# Altium PCB AdaptadorUSB.PCBDOC
Units mm, origin at the board's own origin, x right, y up, seen from the top; angles counter-clockwise.
Board outline 152.4 x 101.6 mm, 2 copper layers (Top Layer, Bottom Layer); 14 components, 31 nets, 108 pads, 3 vias.
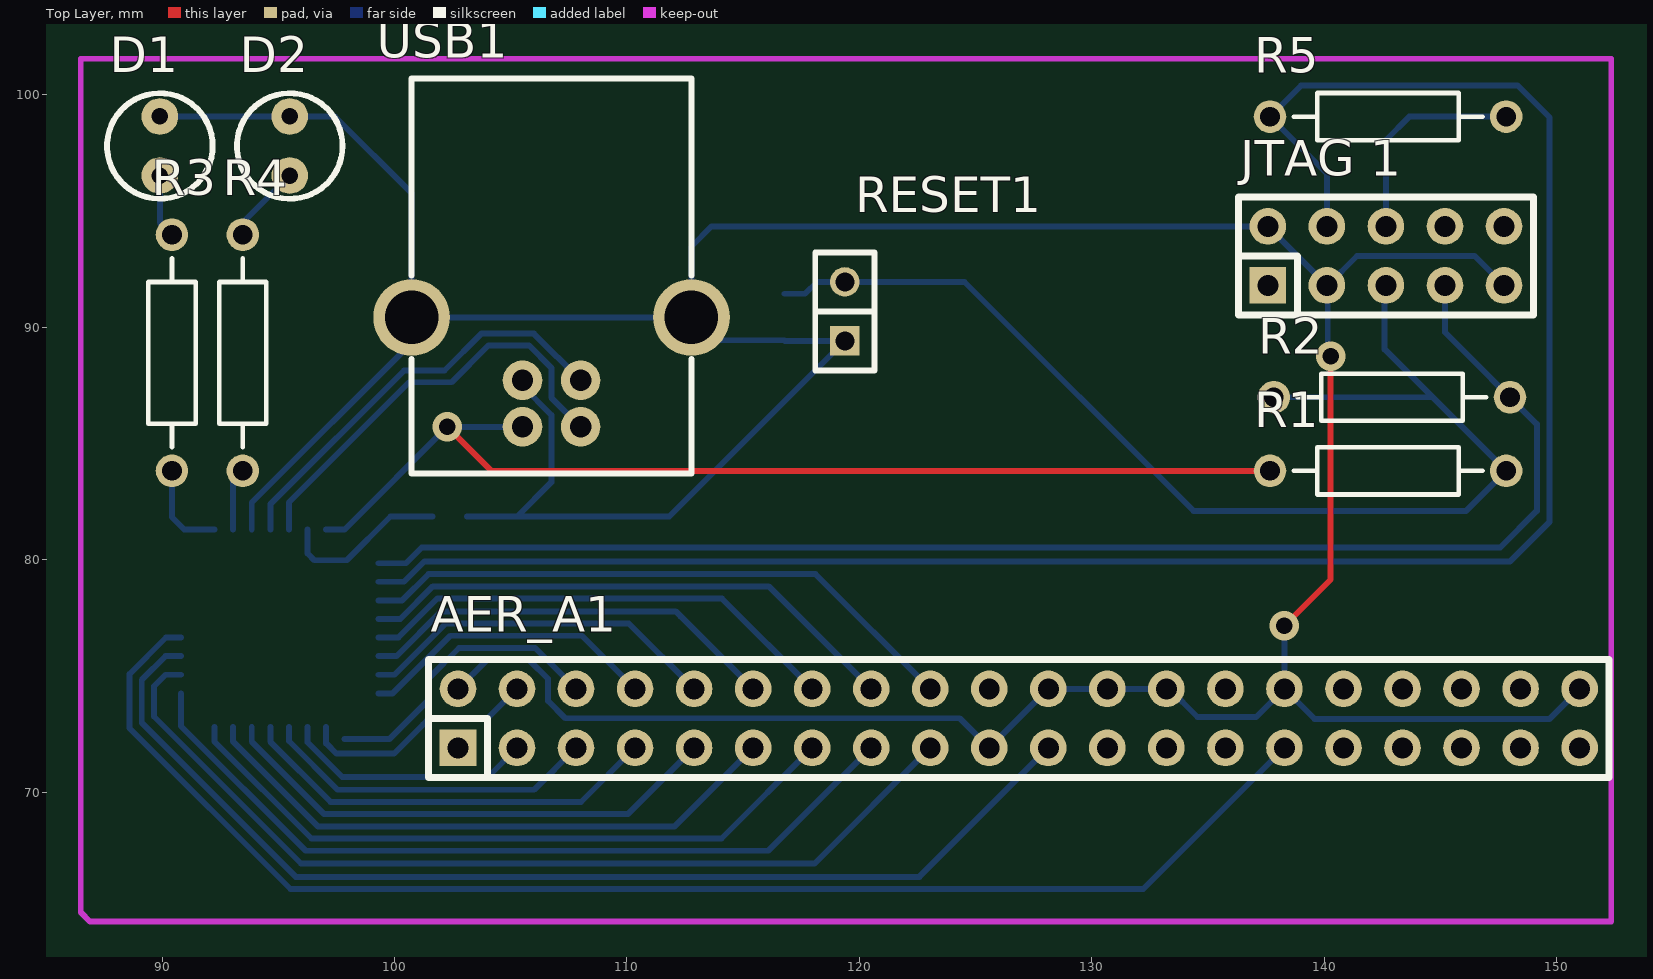
[diagram p0: Top Layer view]
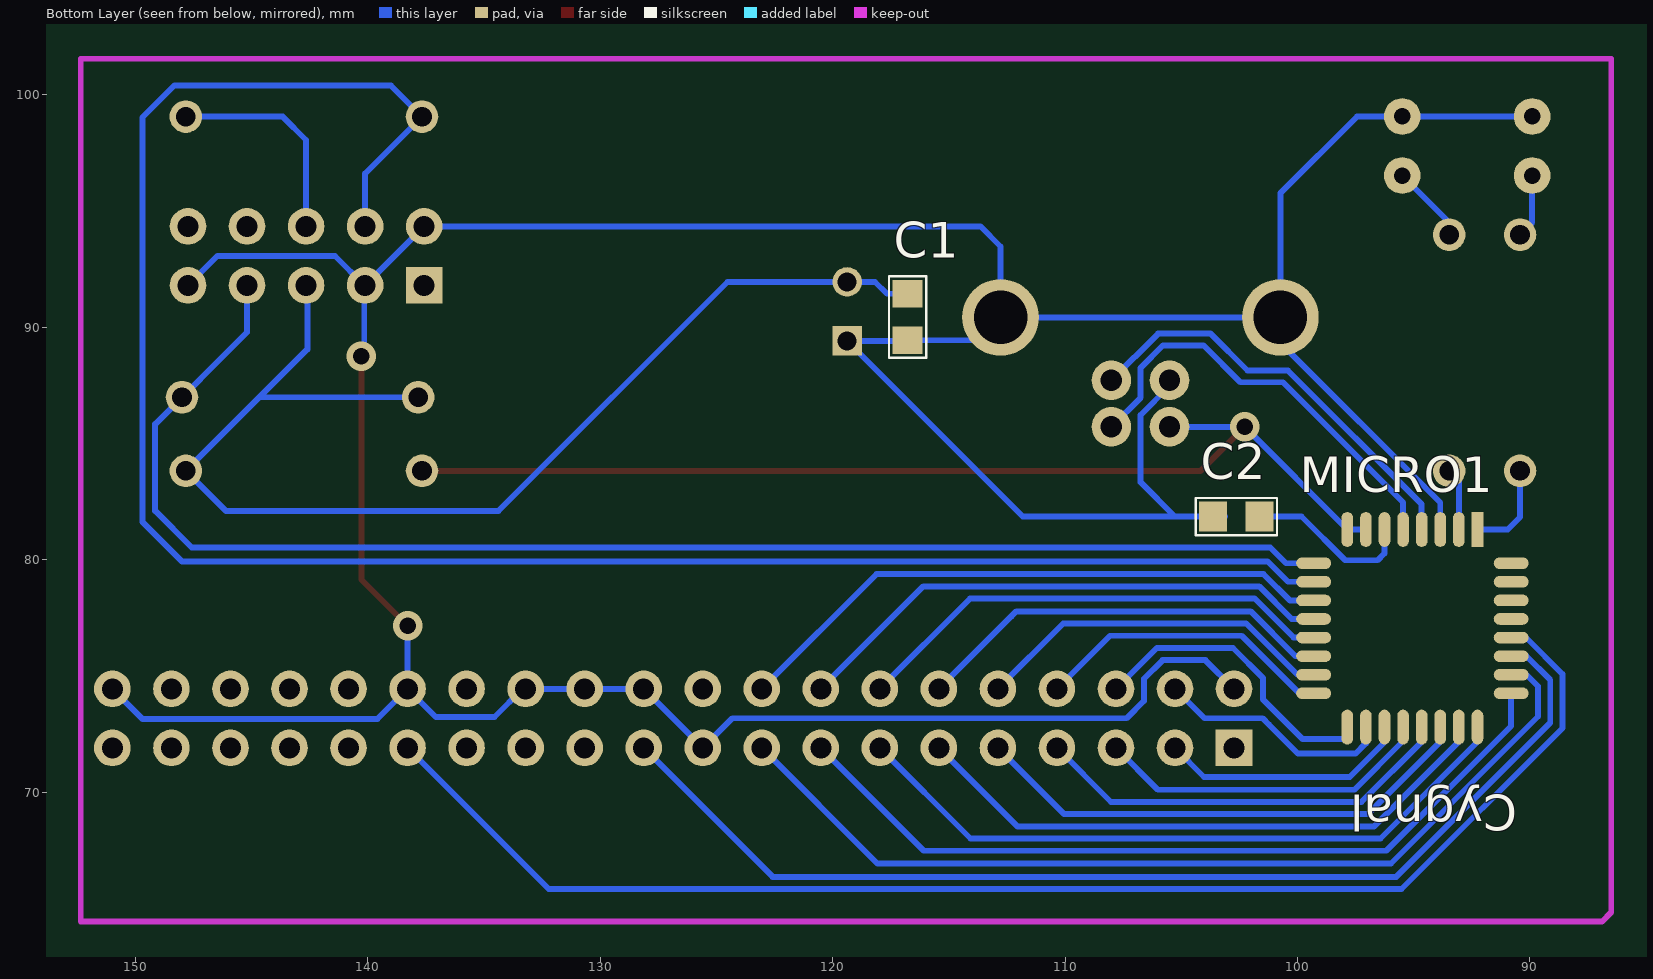
[diagram p1: Bottom Layer view, seen from below]

## Layer stack, top to bottom
Top Layer: signal copper 0.0356
Dielectric: dielectric 0.32, FR-4, Dk 4.8
Bottom Layer: signal copper 0.0356

## Board outline
25.4,25.4 177.8,25.4 177.8,127 25.4,127

## Design rules (kind name [scope] priority, off if disabled: settings)
Clearance [All] p1: gap=0.254
ComponentClearance [All] p1: gap=0.254 collisioncheckmode=0
PolygonConnect [All] p1: connectstyle=Relief reliefconductorwidth=0.254 reliefentries=4 polygonreliefangle="90 Angle"
RoutingLayers [All] p1: top layer=Horizontal bottom layer=Vertical
RoutingVias [All] p1: holewidth=0.711 width=1.27 viastyle="Through Hole" minholewidth=0.711 minwidth=1.27 maxholewidth=0.711 maxwidth=1.27
SolderMaskExpansion [All] p1: expansion=0.102
TestPointUsage [All] p1: valid=0 allowmultiple=FALSE
Testpoint [All] p1: side=15 testpointundercomponent=TRUE minsize=1.016 maxsize=2.54 preferedsize=1.524 minholesize=0 maxholesize=1.016 preferedholesize=0.813 testpointgrid=0.025 style=1023 order=-539222988
Width [All] p1: maxlimit=0.254 minlimit=0.254 preferedwidth=0.254
16 further rules are at their usual default settings.

## Components (designator, comment, footprint, x,y, rotation, side; value= is the part's Value field where it differs from the comment)
AER_A1 "*" IDC-40 102.732,71.91 r0 top
C1 "1 uF" "CAP 10" 114.3,92.964 r90 bottom
C2 "1 uF" "CAP 10" 105.156,84.328 r0 bottom
D1 "" LED 89.916,96.52 r90 top (schematic designator D2)
D2 "" LED 95.504,96.52 r90 top (schematic designator D1)
"JTAG 1" "" IDC-10 137.569,91.798 r0 top
MICRO1 "*" LQFP-32 91.556,80.546 r0 bottom
R1 "1K" AXIAL-0.4 142.748,83.82 r180 top
R2 "1K" AXIAL-0.4 142.914,86.985 r180 top
R3 "220" AXIAL-0.4 90.424,88.9 r270 top (schematic designator R5)
R4 "220" AXIAL-0.4 93.472,88.9 r270 top
R5 "1 K" AXIAL-0.4 142.748,99.06 r180 top (schematic designator R3)
RESET1 "" SIP-2 119.38,89.408 r90 top
USB1 "" USB_CON 112.776,90.424 r180 top

## Footprints (in the part's own frame and the unit in brackets; to place one, negate y for a bottom-side part, rotate by r counter-clockwise, add the part's x,y. Pads: shape width x height; smd on the part's side, far side on the other; paste and mask are expansions set on the pad)
AXIAL-0.4 [mm]
  round 1.4 hole 0.85: 1(-5.08,0) 2(5.08,0)
  silkscreen extent -4.06,-1.02 4.06,1.02
"CAP 10" [mm]
  rect 1.2x1.3 smd: 1(-1.526,2.474) 2(-3.526,2.474)
  silkscreen extent -4.28,1.67 -0.78,3.27
IDC-10 [mil]
  rect 62x62 hole 35.43: 1(0.27,0.06)
  round 62 hole 35.43: 2(0.27,100.06) 3(100.27,0.06) 4(100.27,100.06) 5(200.27,0.06) 6(200.27,100.06) 7(300.27,0.06) 8(300.27,100.06) 9(400.27,0.06) 10(400.27,100.06)
  silkscreen extent -50,-50 450,150
IDC-40 [mil]
  rect 62x62 hole 35.43: 1(-0.12,-0.39)
  round 62 hole 35.43: 2(-0.12,99.61) 3(99.88,-0.39) 4(99.88,99.61) 5(199.88,-0.39) 6(199.88,99.61) 7(299.88,-0.39) 8(299.88,99.61) 9(399.88,-0.39) 10(399.88,99.61) 11(499.88,-0.39) 12(499.88,99.61) 13(599.88,-0.39) 14(599.88,99.61) 15(699.88,-0.39) 16(699.88,99.61) 17(799.88,-0.39) 18(799.88,99.61) 19(899.88,-0.39) 20(899.88,99.61) 21(999.88,-0.39) 22(999.88,99.61) 23(1099.88,-0.39) 24(1099.88,99.61) 25(1199.88,-0.39) 26(1199.88,99.61) 27(1299.88,-0.39) 28(1299.88,99.61) 29(1399.88,-0.39) 30(1399.88,99.61) 31(1499.88,-0.39) 32(1499.88,99.61) 33(1599.88,-0.39) 34(1599.88,99.61) 35(1699.88,-0.39) 36(1699.88,99.61) 37(1799.88,-0.39) 38(1799.88,99.61) 39(1899.88,-0.39) 40(1899.88,99.61)
  silkscreen extent -50,-50 1950,150
LED [mil]
  round 62 hole 28: A(0.26,0.45) K(100.26,0.45)
  silkscreen extent -39,-89 140,90
LQFP-32 [mm]
  rect 0.5x1.5 smd: 1(0.7,-0.75)
  oval 0.5x1.5 smd: 2(1.5,-0.75) 3(2.3,-0.75) 4(3.1,-0.75) 5(3.9,-0.75) 6(4.7,-0.75) 7(5.5,-0.75) 8(6.3,-0.75) 17(6.3,7.75) 18(5.5,7.75) 19(4.7,7.75) 20(3.9,7.75) 21(3.1,7.75) 22(2.3,7.75) 23(1.5,7.75) 24(0.7,7.75)
  oval 1.5x0.5 smd: 9(7.75,0.7) 10(7.75,1.5) 11(7.75,2.3) 12(7.75,3.1) 13(7.75,3.9) 14(7.75,4.7) 15(7.75,5.5) 16(7.75,6.3) 25(-0.75,6.3) 26(-0.75,5.5) 27(-0.75,4.7) 28(-0.75,3.9) 29(-0.75,3.1) 30(-0.75,2.3) 31(-0.75,1.5) 32(-0.75,0.7)
SIP-2 [mil]
  rect 50x50 hole 32: 1(0.03,0.24)
  round 50 hole 32: 2(100.03,0.24)
  silkscreen extent -50,-50 150,50
USB_CON [mm]
  round 1.7 hole 0.92: 1(7.27,4.71) 2(4.77,4.71) 3(4.77,2.71) 4(7.27,2.71)
  round 3.3 hole 2.3: 5(0,0) 6(12.04,0)
  silkscreen extent 0,-10.28 12.04,6.72

## Part data
AER_A1: library part CON_AER1
C1 C2: library part CAP, "Capacitor"
D1 D2: library part LED
"JTAG 1": library part CON10, "Connector"
MICRO1: library part C8051F320
R1 R2 R3 R4 R5: library part RES1
RESET1: library part SW-PB
USB1: library part CON6, "Connector"

## Via types
v1: diameter 1.27, hole 0.711, Top Layer to Bottom Layer, 3 vias

## Nets (pads, with @x,y where several pads share a name; then routed paths per layer and width w, separated by ;. In a path a pad name is that pad's centre, name@x,y a point inside that pad or via, vN(x,y) a via of type N, cw(c..) or ccw(c..) an arc to the next point about the centre after c; other vN are vias at no path point)
ACK_N: AER_A1.29 MICRO1.28 | length 60.3
  Bottom Layer w0.254: MICRO1.28 90.171,76.646 88.6,75.075 88.6,72.75 95.525,65.825 132.214,65.825 AER_A1.29
AER0: AER_A1.17 MICRO1.26 | length 40.7
  Bottom Layer w0.254: MICRO1.26 90.146,75.046 89.65,74.55 89.65,73.25 95.975,66.925 118.074,66.925 AER_A1.17
AER1: AER_A1.15 MICRO1.25 | length 35.2
  Bottom Layer w0.254: MICRO1.25 90.806,72.844 96.175,67.475 116.084,67.475 AER_A1.15
AER2: AER_A1.13 MICRO1.24 | length 29.7
  Bottom Layer w0.254: MICRO1.24 92.256,72.169 96.425,68 114.069,68 AER_A1.13
AER3: AER_A1.11 MICRO1.23 | length 25.9
  Bottom Layer w0.254: MICRO1.23 93.056,72.169 96.7,68.525 112.054,68.525 AER_A1.11
AER4: AER_A1.9 MICRO1.22 | length 22.1
  Bottom Layer w0.254: MICRO1.22 93.856,72.169 96.975,69.05 110.039,69.05 AER_A1.9
AER5: AER_A1.7 MICRO1.21 | length 18.4
  Bottom Layer w0.254: MICRO1.21 94.656,72.169 97.25,69.575 108.024,69.575 AER_A1.7
AER6: AER_A1.5 MICRO1.20 | length 14.6
  Bottom Layer w0.254: MICRO1.20 95.456,72.194 97.55,70.1 106.009,70.1 AER_A1.5
AER7: AER_A1.3 MICRO1.19 | length 10.8
  Bottom Layer w0.254: MICRO1.19 96.256,72.144 97.75,70.65 104.019,70.65 AER_A1.3
AER8: AER_A1.4 MICRO1.18 | length 10.3
  Bottom Layer w0.254: MICRO1.18 97.056,72.094 97.5,71.65 99.975,71.65 101.229,72.904 101.5,73.175 104.004,73.175 AER_A1.4
AER9: AER_A1.6 MICRO1.17 | length 12.8
  Bottom Layer w0.254: MICRO1.17@97.856,72.288 99.788,72.288 101.475,73.975 101.475,74.9 102.775,76.2 106.049,76.2 AER_A1.6
AER10: AER_A1.8 MICRO1.16 | length 13
  Bottom Layer w0.254: MICRO1.16 99.921,74.246 102.4,76.725 108.064,76.725 AER_A1.8
AER11: AER_A1.10 MICRO1.15 | length 15.7
  Bottom Layer w0.254: MICRO1.15 100.003,75.046 102.207,77.25 110.079,77.25 AER_A1.10
AER12: AER_A1.12 MICRO1.14 | length 18.3
  Bottom Layer w0.254: MICRO1.14 100.084,75.846 102.013,77.775 112.094,77.775 112.312,77.557 AER_A1.12
AER13: AER_A1.14 MICRO1.13 | length 21
  Bottom Layer w0.254: MICRO1.13 100.166,76.646 101.845,78.325 114.084,78.325 AER_A1.14
AER14: AER_A1.16 MICRO1.12 | length 23.6
  Bottom Layer w0.254: MICRO1.12 100.247,77.446 101.651,78.85 116.099,78.85 AER_A1.16
AER15: AER_A1.18 MICRO1.11 | length 26.3
  Bottom Layer w0.254: MICRO1.11 100.329,78.246 101.458,79.375 118.114,79.375 AER_A1.18
GND: "JTAG 1.2" "JTAG 1.3" "JTAG 1.9" AER_A1.2 AER_A1.19 AER_A1.22 AER_A1.24 AER_A1.26 AER_A1.30 AER_A1.40 C1.2 C2.1 D1.K D2.K MICRO1.3 RESET1.1 USB1.4 USB1.5 USB1.6 | length 187.6
  Top Layer w0.254: v1(138.289,77.161) 140.275,79.147 v1(140.275,88.75)
  Bottom Layer w0.254: D1.K 97.433,99.067 100.736,95.764 100.736,89.336 93.856,82.456 MICRO1.3 ; USB1.6 USB1.5 ; AER_A1.2 103.964,75.675 105.8,75.675 106.6,74.875 106.6,73.925 107.35,73.175 124.314,73.175 AER_A1.19 AER_A1.22 AER_A1.24 133.335,74.44 134.55,73.225 137.074,73.225 AER_A1.30 ; C2.1@103.122,81.854 111.819,81.854 RESET1.1 C1.2@116.804,89.409 ; 105.275,81.854 106.75,83.329 106.75,86.225 105.506,87.469 USB1.4 ; C1.2 113.762,89.438 USB1.5 ; v1(138.289,77.161) AER_A1.30 ; v1(140.275,88.75) 140.154,88.871 140.154,91.8 ; 147.736,91.8 146.475,93.06 141.415,93.06 140.154,91.8 ; AER_A1.40 149.699,73.15 139.579,73.15 AER_A1.30 ; USB1.5 112.776,93.476 113.64,94.34 137.576,94.34 140.116,91.8 140.154,91.8
NetC1_1: "JTAG 1.5" C1.1 R1.1 R2.2 RESET1.2 | length 53
  Bottom Layer w0.254: C1.1 117.663,91.438 118.174,91.949 124.526,91.949 134.375,82.1 146.108,82.1 R1.1 142.6,89.048 142.6,91.744 ; R2.2 144.663,86.985
NetC2_2: C2.2 MICRO1.6 | length 7.3
  Bottom Layer w0.254: MICRO1.6 96.256,80.269 96.55,79.975 97.95,79.975 99.829,81.854 C2.2
NetD1_A: D1.A R3.1 | length 2.8
  Bottom Layer w0.254: D1.A 89.905,94.499 R3.1
NetD2_A: D2.A R4.1 | length 3.4
  Bottom Layer w0.254: R4.1 93.472,94.506 D2.A
"NetJTAG 1_4": "JTAG 1.4" MICRO1.10 R5.2 | length 87.8
  Bottom Layer w0.254: MICRO1.10 100.41,79.046 101.289,79.925 148,79.925 149.7,81.625 149.7,99.025 148.325,100.4 139.008,100.4 R5.2 140.116,96.612 140.116,94.34
"NetJTAG 1_6": "JTAG 1.6" R5.1 | length 9.3
  Bottom Layer w0.254: 142.656,94.34 142.656,98.056 143.66,99.06 R5.1
"NetJTAG 1_7": "JTAG 1.7" MICRO1.9 R2.1 | length 62.1
  Bottom Layer w0.254: MICRO1.9 100.492,79.846 101.171,80.525 147.575,80.525 149.15,82.1 149.15,85.829 145.196,89.783 145.196,91.8
NetMICRO1_1: MICRO1.1 R3.2 | length 4
  Bottom Layer w0.254: R3.2 90.424,81.826 90.954,81.296 MICRO1.1
NetMICRO1_2: MICRO1.2 R4.2 | length 2.4
  Bottom Layer w0.254: MICRO1.2 R4.2@93.056,83.731
NetMICRO1_4: MICRO1.4 USB1.3 | length 18.3
  Bottom Layer w0.254: MICRO1.4 94.656,82.381 100.413,88.138 102.15,88.138 103.737,89.725 105.995,89.725 USB1.3
NetMICRO1_5: MICRO1.5 USB1.2 | length 18.7
  Bottom Layer w0.254: MICRO1.5 95.456,82.463 100.624,87.63 102.455,87.63 104.042,89.217 105.785,89.217 106.75,88.252 106.75,86.97 USB1.2
REQ_N: AER_A1.21 MICRO1.27 | length 48
  Bottom Layer w0.254: MICRO1.27 90.146,75.846 89.125,74.825 89.125,72.975 95.75,66.35 122.579,66.35 AER_A1.21
VCC_3.3V: MICRO1.7 MICRO1.8 R1.2 USB1.1 | length 46.5
  Top Layer w0.254: v1(102.274,85.714) 104.168,83.82 R1.2
  Bottom Layer w0.254: MICRO1.7 MICRO1.8 v1(102.274,85.714) USB1.1
pads on no net: "JTAG 1.1" "JTAG 1.8" "JTAG 1.10" AER_A1.1 AER_A1.20 AER_A1.23 AER_A1.25 AER_A1.27 AER_A1.28 AER_A1.31 AER_A1.32 AER_A1.33 AER_A1.34 AER_A1.35 AER_A1.36 AER_A1.37 AER_A1.38 AER_A1.39 MICRO1.29 MICRO1.30 MICRO1.31 MICRO1.32

## Keep-outs
Keep-Out Layer:
  lines w0.254: 86.5,64.825 86.9,64.425 152.35,64.425 152.35,101.55 86.5,101.55 86.5,64.825

## Text inside footprints (layer, text, board x,y; h text height)
MICRO1: Bottom Overlay "Cygnal" at 90.54,69.878 h1.52 r180